# EAGLE board 2PDT Switch Breakout (EAGLE 9.5.0)
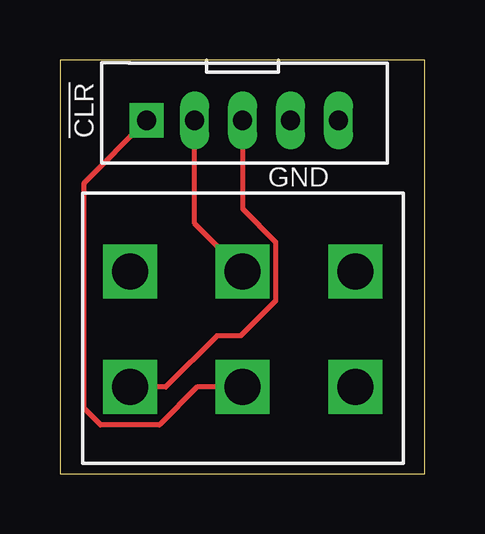
[diagram p0: board, top side]
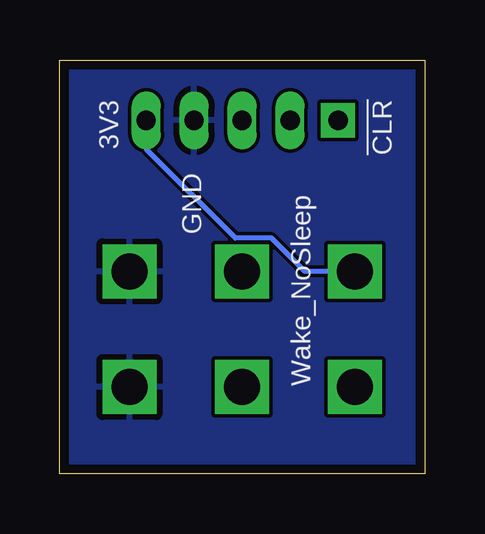
[diagram p1: board, bottom side, seen from below]

Size 15.22 x 17.26 mm. Coordinates in mm from the lower left corner, seen from the top.
Outline: 0,0 15.22,0 15.22,17.26 0,17.26 0,0
Copper layers (1*16): Top 0.035559375mm / dielectric 1.6mm / Bottom 0.035559375mm
Design rules "oshpark-2layer": minimum track width 6mil, minimum drill 10mil, track to track 6mil, track to pad 6mil, pad to pad 6mil, via to via 6mil, smd to smd 6mil, copper to edge 15mil, drill to drill 6mil, minimum pad ring 5mil, minimum via ring 5mil, stop-mask expansion 2.5mil, vias tented up to drill 0mil, thermal gap 10mil

## Footprints (pad centres in the part's own frame; a part is rotated, then mirrored left to right if it is on the bottom)
2PDT_SWITCH_SMD = drill 1.5 square: 1 0,-9.4; 2 0,-4.7; 3 0,0; 4 4.83,-9.4; 5 4.83,-4.7; 6 4.83,0
2MM_5POS_HEADER = drill 0.8 pad 1.422 square: 1 -4,0 | drill 0.8 long: 2 -2,0; 3 0,0; 4 2,0; 5 4,0

## Placement (x,y rotation side)
U$1  2PDT_SWITCH  [2PDT_SWITCH_SMD]  12.32,8.45 270 top
U$2  2MM_JST_PH_5POS  [2MM_5POS_HEADER]  7.62,14.74 0 top

## Library data of the parts
U$1 U$2 = eDNA

## Nets
!CLR: U$1.5 U$2.1
+3V3: U$1.1 U$2.5
GND: U$1.3 U$1.6 U$2.4
RTC_INT: U$1.4 U$2.3
WAKE_NOSLEEP: U$1.2 U$2.2

## Tracks (layer width: path | path; a pad name or v marks a point on that pad's centre or on a via)
!CLR
  Top 0.203: U$1.5 5.73,3.62 4.15,2.04 1.69,2.04 1,2.73 1,12.12 U$2.1
+3V3
  Bottom 0.203: U$1.1 5.01,8.45 6.39,9.82 7.9,9.82 11.62,13.54 U$2.5
GND
  pour Bottom: 0,17.59 15.24,17.59 15.24,0 0,0
RTC_INT
  Top 0.203: U$2.3 7.62,11.05 9,9.68 9,7.22 8.85,7.07 7.54,5.76 6.55,5.76 4.41,3.62 U$1.4
WAKE_NOSLEEP
  Top 0.203: U$1.2 5.62,10.45 U$2.2

## Text on the board
tPlace: !CLR | GND
bPlace: !CLR | 3V3 | GND | Wake_NoSleep
tDocu: ON ON